# Altium PCB PCB1.PcbDoc
Units mm, origin at the board's own origin, x right, y up, seen from the top; angles counter-clockwise.
Board outline 99.06 x 101.35 mm, 2 copper layers (Top Layer, Bottom Layer); 129 components, 14 nets, 392 pads, 0 vias.
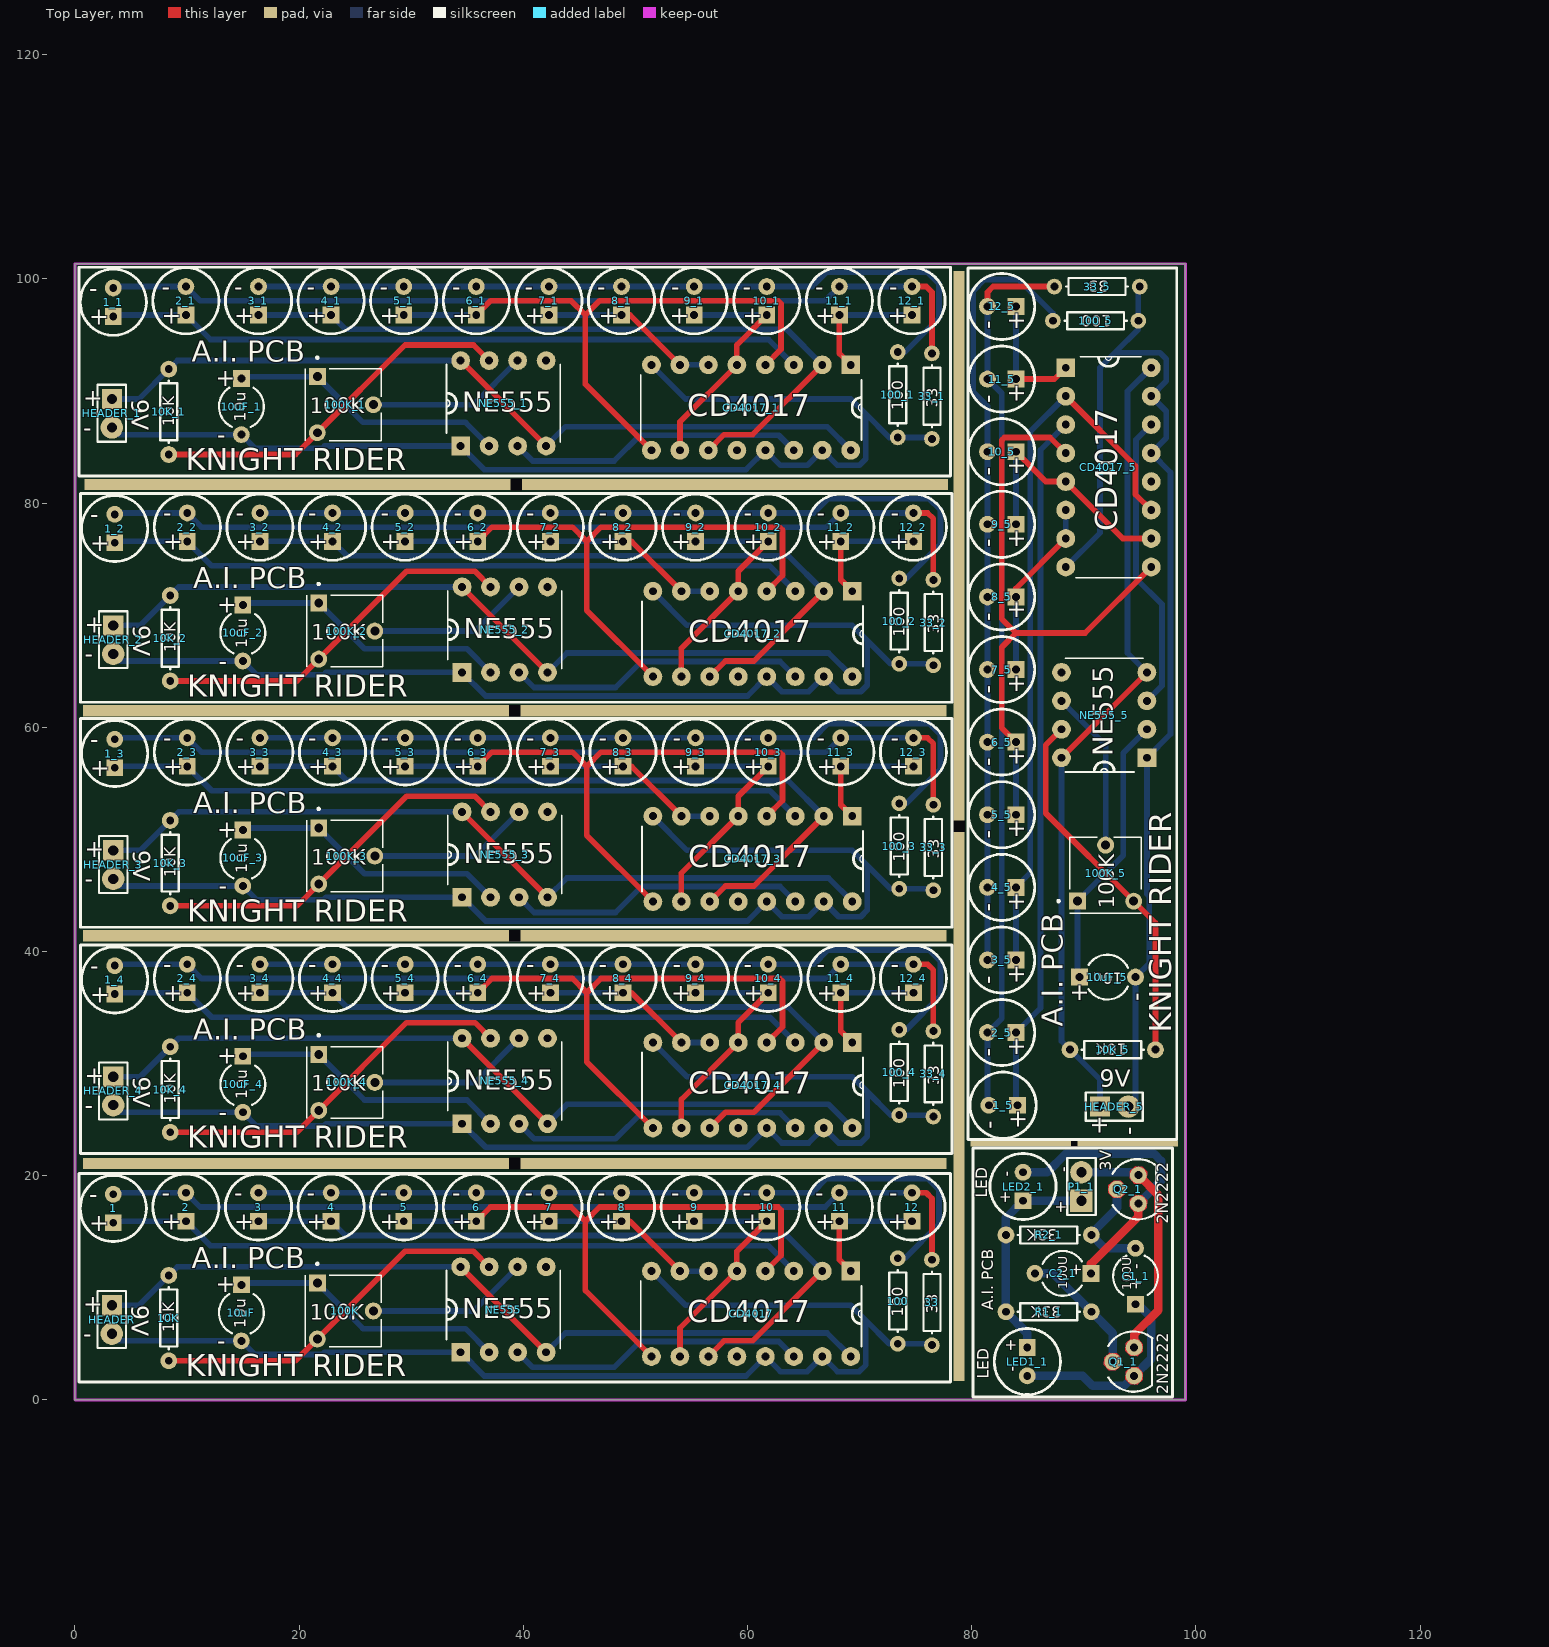
[diagram p0: Top Layer view]
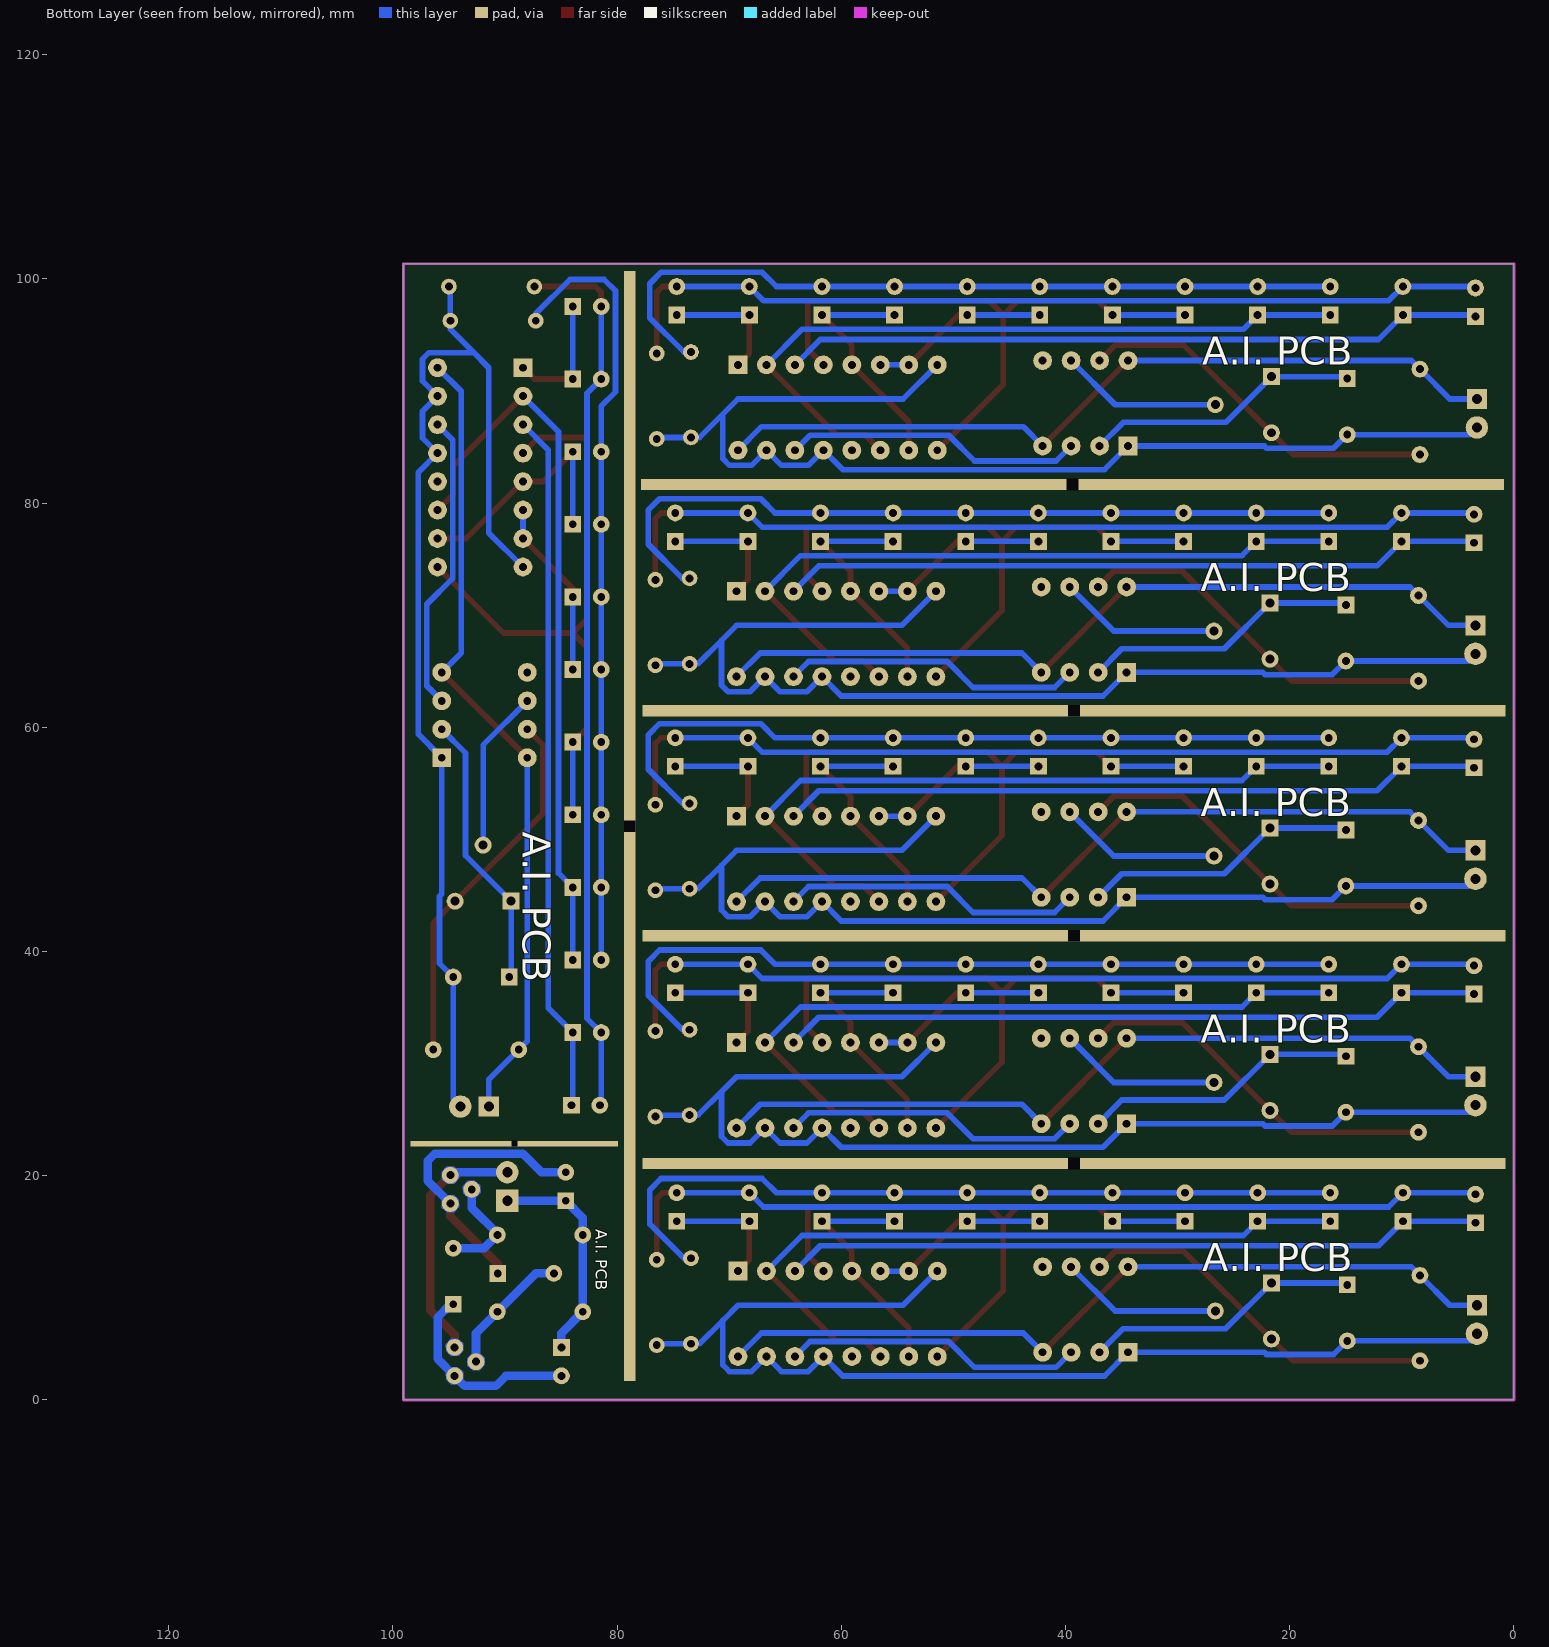
[diagram p1: Bottom Layer view, seen from below]

## Layer stack, top to bottom
Top Solder: solder mask 0.0102, Solder Resist, Dk 3.5
Top Layer: signal copper 0.0356
Dielectric 1: dielectric 0.32, FR-4, Dk 4.8
Bottom Layer: signal copper 0.0356
Bottom Solder: solder mask 0.0102, Solder Resist, Dk 3.5

## Board outline
0,0 0,101.346 99.06,101.346 99.06,0

## Design rules (kind name [scope] priority, off if disabled: settings)
Clearance [All] p1: gap=0.254 ignorepadtopadclearanceinfootprint=FALSE except(0: Arc-Hole Track-Hole SMDPad-Hole THPad-Hole Via-Hole Fill-Hole Poly-Hole Region-Hole Text-Hole)
PolygonConnect [All] p1: connectstyle=Relief reliefconductorwidth=0.254 reliefentries=4 polygonreliefangle="90 Angle" airgapwidth=0.254
RoutingVias [All] p1: holewidth=0.711 width=1.27 viastyle="Through Hole" minholewidth=0.711 minwidth=1.27 maxholewidth=0.711 maxwidth=1.27
SolderMaskExpansion [All] p1: expansion=0.102
Width [All] p1: maxlimit=0.762 minlimit=0.254 preferedwidth=0.508
30 further rules are at their usual default settings.

## Classes and differential pairs
component class Sheet1: 1 2 3 4 5 6 7 8 9 10 10K 10uF 11 12 33 100 100K CD4017 HEADER NE555

## Components (designator, comment, footprint, x,y, rotation, side; value= is the part's Value field where it differs from the comment)
1 "L-53GD" L-53GD 3.429,17.076 r90 top
1_1 "L-53GD" L-53GD 3.429,97.917 r90 top (schematic designator 1)
1_2 "L-53GD" L-53GD 3.556,77.724 r90 top (schematic designator 1)
1_3 "L-53GD" L-53GD 3.556,57.658 r90 top (schematic designator 1)
1_4 "L-53GD" L-53GD 3.556,37.465 r90 top (schematic designator 1)
1_5 "L-53GD" L-53GD 82.804,26.289 r180 top (schematic designator 1)
2 "L-53GD" L-53GD 9.906,17.203 r90 top
2_1 "L-53GD" L-53GD 9.906,98.044 r90 top (schematic designator 2)
2_2 "L-53GD" L-53GD 10.033,77.851 r90 top (schematic designator 2)
2_3 "L-53GD" L-53GD 10.033,57.785 r90 top (schematic designator 2)
2_4 "L-53GD" L-53GD 10.033,37.592 r90 top (schematic designator 2)
2_5 "L-53GD" L-53GD 82.677,32.766 r180 top (schematic designator 2)
3 "L-53GD" L-53GD 16.383,17.203 r90 top
3_1 "L-53GD" L-53GD 16.383,98.044 r90 top (schematic designator 3)
3_2 "L-53GD" L-53GD 16.51,77.851 r90 top (schematic designator 3)
3_3 "L-53GD" L-53GD 16.51,57.785 r90 top (schematic designator 3)
3_4 "L-53GD" L-53GD 16.51,37.592 r90 top (schematic designator 3)
3_5 "L-53GD" L-53GD 82.677,39.243 r180 top (schematic designator 3)
4 "L-53GD" L-53GD 22.86,17.203 r90 top
4_1 "L-53GD" L-53GD 22.86,98.044 r90 top (schematic designator 4)
4_2 "L-53GD" L-53GD 22.987,77.851 r90 top (schematic designator 4)
4_3 "L-53GD" L-53GD 22.987,57.785 r90 top (schematic designator 4)
4_4 "L-53GD" L-53GD 22.987,37.592 r90 top (schematic designator 4)
4_5 "L-53GD" L-53GD 82.677,45.72 r180 top (schematic designator 4)
5 "L-53GD" L-53GD 29.337,17.203 r90 top
5_1 "L-53GD" L-53GD 29.337,98.044 r90 top (schematic designator 5)
5_2 "L-53GD" L-53GD 29.464,77.851 r90 top (schematic designator 5)
5_3 "L-53GD" L-53GD 29.464,57.785 r90 top (schematic designator 5)
5_4 "L-53GD" L-53GD 29.464,37.592 r90 top (schematic designator 5)
5_5 "L-53GD" L-53GD 82.677,52.197 r180 top (schematic designator 5)
6 "L-53GD" L-53GD 35.814,17.203 r90 top
6_1 "L-53GD" L-53GD 35.814,98.044 r90 top (schematic designator 6)
6_2 "L-53GD" L-53GD 35.941,77.851 r90 top (schematic designator 6)
6_3 "L-53GD" L-53GD 35.941,57.785 r90 top (schematic designator 6)
6_4 "L-53GD" L-53GD 35.941,37.592 r90 top (schematic designator 6)
6_5 "L-53GD" L-53GD 82.677,58.674 r180 top (schematic designator 6)
7 "L-53GD" L-53GD 42.291,17.203 r90 top
7_1 "L-53GD" L-53GD 42.291,98.044 r90 top (schematic designator 7)
7_2 "L-53GD" L-53GD 42.418,77.851 r90 top (schematic designator 7)
7_3 "L-53GD" L-53GD 42.418,57.785 r90 top (schematic designator 7)
7_4 "L-53GD" L-53GD 42.418,37.592 r90 top (schematic designator 7)
7_5 "L-53GD" L-53GD 82.677,65.151 r180 top (schematic designator 7)
8 "L-53GD" L-53GD 48.768,17.203 r90 top
8_1 "L-53GD" L-53GD 48.768,98.044 r90 top (schematic designator 8)
8_2 "L-53GD" L-53GD 48.895,77.851 r90 top (schematic designator 8)
8_3 "L-53GD" L-53GD 48.895,57.785 r90 top (schematic designator 8)
8_4 "L-53GD" L-53GD 48.895,37.592 r90 top (schematic designator 8)
8_5 "L-53GD" L-53GD 82.677,71.628 r180 top (schematic designator 8)
9 "L-53GD" L-53GD 55.245,17.203 r90 top
9_1 "L-53GD" L-53GD 55.245,98.044 r90 top (schematic designator 9)
9_2 "L-53GD" L-53GD 55.372,77.851 r90 top (schematic designator 9)
9_3 "L-53GD" L-53GD 55.372,57.785 r90 top (schematic designator 9)
9_4 "L-53GD" L-53GD 55.372,37.592 r90 top (schematic designator 9)
9_5 "L-53GD" L-53GD 82.677,78.105 r180 top (schematic designator 9)
10 "L-53GD" L-53GD 61.722,17.203 r90 top
10_1 "L-53GD" L-53GD 61.722,98.044 r90 top (schematic designator 10)
10_2 "L-53GD" L-53GD 61.849,77.851 r90 top (schematic designator 10)
10_3 "L-53GD" L-53GD 61.849,57.785 r90 top (schematic designator 10)
10_4 "L-53GD" L-53GD 61.849,37.592 r90 top (schematic designator 10)
10_5 "L-53GD" L-53GD 82.677,84.582 r180 top (schematic designator 10)
10K "Res1" AXIAL-0.3#1 8.382,7.297 r90 top value=1K
10K_1 "Res1" AXIAL-0.3#1 8.382,88.138 r90 top value=1K (schematic designator 10K)
10K_2 "Res1" AXIAL-0.3#1 8.509,67.945 r90 top value=1K (schematic designator 10K)
10K_3 "Res1" AXIAL-0.3#1 8.509,47.879 r90 top value=1K (schematic designator 10K)
10K_4 "Res1" AXIAL-0.3#1 8.509,27.686 r90 top value=1K (schematic designator 10K)
10K_5 "Res1" AXIAL-0.3#1 92.583,31.242 r180 top value=1K (schematic designator 10K)
10uF "Cap2" CAPR5-4X5 14.859,7.765 r270 top value=10uF
10uF_1 "Cap2" CAPR5-4X5 14.859,88.606 r270 top value=10uF (schematic designator 10uF)
10uF_2 "Cap2" CAPR5-4X5 14.986,68.413 r270 top value=10uF (schematic designator 10uF)
10uF_3 "Cap2" CAPR5-4X5 14.986,48.347 r270 top value=10uF (schematic designator 10uF)
10uF_4 "Cap2" CAPR5-4X5 14.986,28.154 r270 top value=10uF (schematic designator 10uF)
10uF_5 "Cap2" CAPR5-4X5 92.115,37.719 r0 top value=10uF (schematic designator 10uF)
11 "L-53GD" L-53GD 68.199,17.203 r90 top
11_1 "L-53GD" L-53GD 68.199,98.044 r90 top (schematic designator 11)
11_2 "L-53GD" L-53GD 68.326,77.851 r90 top (schematic designator 11)
11_3 "L-53GD" L-53GD 68.326,57.785 r90 top (schematic designator 11)
11_4 "L-53GD" L-53GD 68.326,37.592 r90 top (schematic designator 11)
11_5 "L-53GD" L-53GD 82.677,91.059 r180 top (schematic designator 11)
12 "L-53GD" L-53GD 74.676,17.203 r90 top
12_1 "L-53GD" L-53GD 74.676,98.044 r90 top (schematic designator 12)
12_2 "L-53GD" L-53GD 74.803,77.851 r90 top (schematic designator 12)
12_3 "L-53GD" L-53GD 74.803,57.785 r90 top (schematic designator 12)
12_4 "L-53GD" L-53GD 74.803,37.592 r90 top (schematic designator 12)
12_5 "L-53GD" L-53GD 82.677,97.536 r180 top (schematic designator 12)
33 "Res1" AXIAL-0.3#2 76.454,8.694 r90 top value=1K
33_1 "Res1" AXIAL-0.3#2 76.454,89.535 r90 top value=1K (schematic designator 33)
33_2 "Res1" AXIAL-0.3#2 76.581,69.342 r90 top value=1K (schematic designator 33)
33_3 "Res1" AXIAL-0.3#2 76.581,49.276 r90 top value=1K (schematic designator 33)
33_4 "Res1" AXIAL-0.3#2 76.581,29.083 r90 top value=1K (schematic designator 33)
33_5 "Res1" AXIAL-0.3#2 91.186,99.314 r180 top value=1K (schematic designator 33)
100 "Res1" AXIAL-0.3#2 73.406,8.821 r90 top value=1K
100_1 "Res1" AXIAL-0.3#2 73.406,89.662 r90 top value=1K (schematic designator 100)
100_2 "Res1" AXIAL-0.3#2 73.533,69.469 r90 top value=1K (schematic designator 100)
100_3 "Res1" AXIAL-0.3#2 73.533,49.403 r90 top value=1K (schematic designator 100)
100_4 "Res1" AXIAL-0.3#2 73.533,29.21 r90 top value=1K (schematic designator 100)
100_5 "Res1" AXIAL-0.3#2 91.059,96.266 r180 top value=1K (schematic designator 100)
100K "EVN-D8AA03B14" *TRIM_EVN-D8AA03B14 24.13,7.932 r270 top
100K_1 "EVN-D8AA03B14" *TRIM_EVN-D8AA03B14 24.13,88.773 r270 top (schematic designator 100K)
100K_2 "EVN-D8AA03B14" *TRIM_EVN-D8AA03B14 24.257,68.58 r270 top (schematic designator 100K)
100K_3 "EVN-D8AA03B14" *TRIM_EVN-D8AA03B14 24.257,48.514 r270 top (schematic designator 100K)
100K_4 "EVN-D8AA03B14" *TRIM_EVN-D8AA03B14 24.257,28.321 r270 top (schematic designator 100K)
100K_5 "EVN-D8AA03B14" *TRIM_EVN-D8AA03B14 91.948,46.99 r0 top (schematic designator 100K)
C1_1 "Cap1" CAPR5-4X5 94.615,11.033 r90 top value=100uF (schematic designator C1)
C2_1 "Cap2" CAPR5-4X5 88.138,11.287 r180 top value=100uF (schematic designator C2)
CD4017 "CD4017BE" *DIP254P762X508-16 51.435,3.868 r270 top
CD4017_1 "CD4017BE" *DIP254P762X508-16 51.435,84.709 r270 top (schematic designator CD4017)
CD4017_2 "CD4017BE" *DIP254P762X508-16 51.562,64.516 r270 top (schematic designator CD4017)
CD4017_3 "CD4017BE" *DIP254P762X508-16 51.562,44.45 r270 top (schematic designator CD4017)
CD4017_4 "CD4017BE" *DIP254P762X508-16 51.562,24.257 r270 top (schematic designator CD4017)
CD4017_5 "CD4017BE" *DIP254P762X508-16 96.012,74.295 r0 top (schematic designator CD4017)
HEADER "Header 2" HDR1X2#1 3.302,8.44 r270 top
HEADER_1 "Header 2" HDR1X2#1 3.302,89.281 r270 top (schematic designator HEADER)
HEADER_2 "Header 2" HDR1X2#1 3.429,69.088 r270 top (schematic designator HEADER)
HEADER_3 "Header 2" HDR1X2#1 3.429,49.022 r270 top (schematic designator HEADER)
HEADER_4 "Header 2" HDR1X2#1 3.429,28.829 r270 top (schematic designator HEADER)
HEADER_5 "Header 2" HDR1X2#1 91.44,26.162 r0 top (schematic designator HEADER)
LED1_1 "L-53GD" L-53GD 84.963,3.413 r270 top (schematic designator LED1)
LED2_1 "L-53GD" L-53GD 84.582,19.034 r90 top (schematic designator LED2)
NE555 "NE555N" *DIP254P762X533-8 42.037,11.869 r90 top
NE555_1 "NE555N" *DIP254P762X533-8 42.037,92.71 r90 top (schematic designator NE555)
NE555_2 "NE555N" *DIP254P762X533-8 42.164,72.517 r90 top (schematic designator NE555)
NE555_3 "NE555N" *DIP254P762X533-8 42.164,52.451 r90 top (schematic designator NE555)
NE555_4 "NE555N" *DIP254P762X533-8 42.164,32.258 r90 top (schematic designator NE555)
NE555_5 "NE555N" *DIP254P762X533-8 88.011,64.897 r180 top (schematic designator NE555)
P1_1 "Header 2" HDR1X2#2 89.789,17.764 r90 top (schematic designator P1)
Q1_1 "P2N2222A" *TO92 94.488,3.413 r90 top (schematic designator Q1)
Q2_1 "P2N2222A" *TO92 94.869,18.78 r90 top (schematic designator Q2)
R1_1 "Res1" AXIAL-0.3#1 86.868,7.858 r180 top value=33K (schematic designator R1)
R2_1 "Res1" AXIAL-0.3#1 86.868,14.716 r180 top value=33K (schematic designator R2)

## Footprints (in the part's own frame and the unit in brackets; to place one, negate y for a bottom-side part, rotate by r counter-clockwise, add the part's x,y. Pads: shape width x height; smd on the part's side, far side on the other; paste and mask are expansions set on the pad)
*DIP254P762X508-16 [mil]
  rect 66x66 hole 27.56: 1(-300,700)
  round 66 hole 27.56: 2(-300,600) 3(-300,500) 4(-300,400) 5(-300,300) 6(-300,200) 7(-300,100) 8(-300,0) 9(0,0) 10(0,100) 11(0,200) 12(0,300) 13(0,400) 14(0,500) 15(0,600) 16(0,700)
  silkscreen extent -265,-38 -35,738
*DIP254P762X533-8 [mil]
  rect 66x66 hole 27.56: 1(-300,300)
  round 66 hole 27.56: 2(-300,200) 3(-300,100) 4(-300,0) 5(0,0) 6(0,100) 7(0,200) 8(0,300)
  silkscreen extent -287,-50 -13,350
*TO92 [mm]
  round 1.5 hole 0.7: 1(1.27,0) 2(0,1.905) 3(-1.27,0)
  Top Layer region: -0.482,0.287 -0.916,0.76 -1.557,0.788 -2.03,0.354 -2.058,-0.287 -1.624,-0.76 -0.983,-0.788 -0.51,-0.354
  Top Layer region: 0.788,2.192 0.354,2.665 -0.287,2.693 -0.76,2.259 -0.788,1.618 -0.354,1.145 0.287,1.117 0.76,1.551
  Top Layer region: 2.058,0.287 1.624,0.76 0.983,0.788 0.51,0.354 0.482,-0.287 0.916,-0.76 1.557,-0.788 2.03,-0.354
  Bottom Layer region: -0.482,0.287 -0.916,0.76 -1.557,0.788 -2.03,0.354 -2.058,-0.287 -1.624,-0.76 -0.983,-0.788 -0.51,-0.354
  Bottom Layer region: 0.788,2.192 0.354,2.665 -0.287,2.693 -0.76,2.259 -0.788,1.618 -0.354,1.145 0.287,1.117 0.76,1.551
  Bottom Layer region: 2.058,0.287 1.624,0.76 0.983,0.788 0.51,0.354 0.482,-0.287 0.916,-0.76 1.557,-0.788 2.03,-0.354
  Multi-Layer region: -0.482,0.287 -0.916,0.76 -1.557,0.788 -2.03,0.354 -2.058,-0.287 -1.624,-0.76 -0.983,-0.788 -0.51,-0.354
  Multi-Layer region: 0.788,2.192 0.354,2.665 -0.287,2.693 -0.76,2.259 -0.788,1.618 -0.354,1.145 0.287,1.117 0.76,1.551
  Multi-Layer region: 2.058,0.287 1.624,0.76 0.983,0.788 0.51,0.354 0.482,-0.287 0.916,-0.76 1.557,-0.788 2.03,-0.354
  silkscreen extent -2.68,-1.61 2.7,2.3
*TRIM_EVN-D8AA03B14 [mm]
  rect 1.508x1.508 hole 0.8: 1(-2.5,-2.5)
  round 1.508 hole 0.8: 2(0,2.5) 3(2.5,-2.5)
  silkscreen extent -4.3,-3.57 3.2,3.2
AXIAL-0.3#1 [mm] "Axial Device, Thru-Hole; 2 Leads; 0.3 in Pin Spacing"
  round 1.5 hole 0.7: 1(-3.81,0) 2(3.81,0)
  silkscreen extent -2.77,-0.76 2.77,0.76
AXIAL-0.3#2 [mm] "Axial Device, Thru-Hole; 2 Leads; 0.3 in Pin Spacing"
  round 1.4 hole 0.7: 1(-3.81,0) 2(3.81,0)
  silkscreen extent -2.77,-0.76 2.77,0.76
CAPR5-4X5 [mm] "Capacitor; 2 Leads"
  rect 1.5x1.5 hole 0.7: 1(-2.5,0)
  round 1.5 hole 0.7: 2(2.5,0)
  silkscreen extent -1.69,-2 1.82,2
HDR1X2#1 [mm] "Connector; Header; 2 Position"
  rect 1.8x1.8 hole 0.9: 1(0,0)
  round 2 hole 0.9: 2(2.54,0)
  silkscreen extent -1.27,-1.27 3.81,1.27
HDR1X2#2 [mm] "Connector; Header; 2 Position"
  rect 2x2 hole 0.9: 1(0,0)
  round 2 hole 0.9: 2(2.54,0)
  silkscreen extent -1.27,-1.27 3.81,1.27
L-53GD [mm]
  rect 1.5x1.5 hole 0.7: 1(-1.27,0)
  round 1.5 hole 0.7: 2(1.27,0)
  silkscreen extent -2.95,-2.95 2.95,2.95

## Part data
1 1_1 1_2 1_3 1_4 1_5 2 2_1 2_2 2_3 2_4 2_5 3 3_1 3_2 3_3 3_4 3_5 4 4_1 4_2 4_3 4_4 4_5 5 5_1 5_2 5_3 5_4 5_5 6 6_1 6_2 6_3 6_4 6_5 7 7_1 7_2 7_3 7_4 7_5 8 8_1 8_2 8_3 8_4 8_5 9 9_1 9_2 9_3 9_4 9_5 10 10_1 10_2 10_3 10_4 10_5 11 11_1 11_2 11_3 11_4 11_5 12 12_1 12_2 12_3 12_4 12_5 LED1_1 LED2_1: "LED", Manufacturer_Name=Kingbright, Mouser Part Number=N/A, RS Part Number=2286004A, Allied_Number=70424261, Allied Price/Stock=http://www.alliedelec.com/kingbright-l-53gd/70424261/, Datasheet Link=http://docs-emea.rs-online.com/webdocs/151e/0900766b8151e408.pdf, Manufacturer_Part_Number=L-53GD, Mouser Price/Stock=https://www.mouser.com/Search/Refine.aspx?Keyword=N%2FA, RS Price/Stock=http://uk.rs-online.com/web/p/products/2286004A
10K 10K_1 10K_2 10K_3 10K_4 10K_5 33 33_1 33_2 33_3 33_4 33_5 100 100_1 100_2 100_3 100_4 100_5 R1_1 R2_1: "Resistor", LatestRevisionDate=17-Jul-2002, LatestRevisionNote="Re-released for DXP Platform.", PackageDescription="Axial Device, Thru-Hole; 2 Leads; 0.3 in Pin Spacing", PackageReference=AXIAL-0.3, Published=8-Jun-2000, Publisher="Altium Limited"
10uF 10uF_1 10uF_2 10uF_3 10uF_4 10uF_5 C2_1: "Capacitor", PackageDescription="Capacitor; 2 Leads", PackageReference=CAPR5-4X5, Published=23-Sep-2002, Publisher="Altium Limited"
100K 100K_1 100K_2 100K_3 100K_4 100K_5: "Trimmer; Carbon; Rest 10 Kilohms; PCB; 1 Turn; Pwr-Rtg 0.1 W; Linear; Top Adj; 6 mm SQ", Package="PQFP-44 Panasonic", Availability=Unavailable, MF="Panasonic Electronic", MP=EVN-D8AA03B14, Price=None, SnapEDA_Link=https://www.snapeda.com/parts/EVN-D8AA03B14/Panasonic%20Electronic%20Components/view-part/?ref=snap
C1_1: library part Cap2, "Capacitor", PackageDescription="Capacitor; 2 Leads", PackageReference=CAPR5-4X5, Published=23-Sep-2002, Publisher="Altium Limited"
CD4017 CD4017_1 CD4017_2 CD4017_3 CD4017_4 CD4017_5: "IC Mos 4017/CD4017BE HARRIS", Package="DIP-16 Intersil", Availability=Unavailable, MF=Texas, MP=CD4017BE, Price=None, SnapEDA_Link=https://www.snapeda.com/parts/CD4017BE/Texas%20Instruments/view-part/?ref=snap
HEADER HEADER_1 HEADER_2 HEADER_3 HEADER_4 HEADER_5 P1_1: "Header, 2-Pin", LatestRevisionDate=17-Jul-2002, LatestRevisionNote="Re-released for DXP Platform.", Publisher="Altium Limited"
NE555 NE555_1 NE555_2 NE555_3 NE555_4 NE555_5: Package="DIP-8 Texas Instruments", Availability=Unavailable, MF="ON Semiconductor", MP=NE555N, Price=None, SnapEDA_Link=https://www.snapeda.com/parts/NE555N/ON%20Semiconductor/view-part/?ref=snap
Q1_1 Q2_1: Package="TO-92 NXP Semiconductors", Availability=Unavailable, MF="ON Semiconductor", MP=P2N2222A, Price=None, SnapEDA_Link=https://www.snapeda.com/parts/P2N2222A/ON%20Semiconductor/view-part/?ref=snap

## Free pads (board coordinates)
  rect 77x1 hole 1 square: 4(39.243,21.082) 4(39.243,41.402) 4(39.243,61.468) 4(39.37,81.661)
  rect 1x99 hole 1 square: 8(78.867,51.181)
  rect 18.5x0.5 hole 0.5 square: 9(89.154,22.86)

## Nets (pads, with @x,y where several pads share a name; then routed paths per layer and width w, separated by ;. In a path a pad name is that pad's centre, name@x,y a point inside that pad or via, vN(x,y) a via of type N, cw(c..) or ccw(c..) an arc to the next point about the centre after c; other vN are vias at no path point)
Net1_1: 1.1 2.1 CD4017.3 | length 62.6
  Bottom Layer w0.508: 1.1 3.556,15.933 2.1 12.09,13.749 61.874,13.749 CD4017.3
Net1_2: 1.2 2.2 11.2 12.2 33.2 | length 79.8
  Top Layer w0.508: 12.2 75.946,18.473 76.454,17.965 33.2
  Bottom Layer w0.508: 1.2 3.556,18.473 2.2 11.176,17.203 66.929,17.203 11.2 12.2
Net3_1: 3.1 4.1 CD4017.2 CD4017.11 | length 65.4
  Top Layer w0.508: CD4017.11 57.912,5.265 60.452,5.265 CD4017.2
  Bottom Layer w0.508: 3.1 4.1 24.13,14.663 63.5,14.663 CD4017.2
Net3_2: 3.2 4.2 5.2 6.2 7.2 8.2 9.2 10.2 100.2 | length 69.6
  Bottom Layer w0.508: 3.2 4.2 5.2 6.2 7.2 8.2 9.2 10.2 65.786,18.473 67.056,19.743 76.073,19.743 77.089,18.727 77.089,15.679 74.041,12.631 100.2
Net5_1: 5.1 6.1 CD4017.4 CD4017.9 | length 55.9
  Top Layer w0.508: 6.1 37.084,17.203 44.272,17.203 45.542,15.933 ; CD4017.9 45.542,9.761 45.542,15.933 ; CD4017.4 62.992,12.885 62.992,16.949 62.738,17.203 46.812,17.203 45.542,15.933
  Bottom Layer w0.508: 5.1 6.1
Net7_1: 7.1 8.1 CD4017.6 CD4017.7 | length 16.1
  Top Layer w0.508: 8.1 49.53,15.933 CD4017.7
  Bottom Layer w0.508: 7.1 8.1 ; CD4017.7 CD4017.6
Net9_1: 9.1 10.1 CD4017.5 CD4017.10 | length 21.8
  Top Layer w0.508: CD4017.10 53.975,6.408 CD4017.5 59.055,13.266 10.1
  Bottom Layer w0.508: 9.1 10.1
Net10K_1: 10K.1 100K.3 NE555.7 | length 33.2
  Top Layer w0.508: 10K.1 19.685,3.487 100K.3 29.464,13.266 35.56,13.266 NE555.7
Net10K_2: 10K.2 CD4017.16 HEADER.1 NE555.4 NE555.8 | length 72.1
  Top Layer w0.508: NE555.8 NE555.4
  Bottom Layer w0.508: HEADER.1 5.715,8.44 10K.2 9.144,11.869 NE555.8 ; NE555.4 43.764,5.976 67.107,5.976 CD4017.16
Net10uF_1: 10uF.1 100K.1 NE555.2 | length 24.7
  Bottom Layer w0.508: 10uF.1 15.026,10.432 100K.1 25.705,6.357 34.849,6.357 NE555.2
Net10uF_2: 10uF.2 33.1 100.1 CD4017.8 CD4017.13 CD4017.15 HEADER.2 NE555.1 | length 103.4
  Bottom Layer w0.508: HEADER.2 3.937,5.265 10uF.2 16.078,4.046 22.073,4.046 22.276,4.249 NE555.1 36.525,2.141 59.868,2.141 CD4017.13 62.941,2.522 65.329,2.522 CD4017.15 68.021,2.522 69.977,2.522 70.561,3.106 70.561,7.094 ; CD4017.8 54.483,8.44 69.215,8.44 70.561,7.094 ; 33.1 76.327,5.011 100.1 72.644,5.011 70.561,7.094
Net11_1: 11.1 12.1 CD4017.1 | length 11.3
  Top Layer w0.508: 11.1 68.199,12.504 CD4017.1
  Bottom Layer w0.508: 11.1 12.1
Net100K_2: 100K.2 NE555.6 | length 14.5
  Bottom Layer w0.508: 100K.2 35.56,7.932 NE555.6
NetCD4017_14: CD4017.14 NE555.3 | length 26.7
  Bottom Layer w0.508: NE555.3 40.843,2.903 48.108,2.903 50.419,5.214 62.789,5.214 CD4017.14
pads on no net: 1_1.1 1_1.2 1_2.1 1_2.2 1_3.1 1_3.2 1_4.1 1_4.2 1_5.1 1_5.2 2_1.1 2_1.2 2_2.1 2_2.2 2_3.1 2_3.2 2_4.1 2_4.2 2_5.1 2_5.2 3_1.1 3_1.2 3_2.1 3_2.2 3_3.1 3_3.2 3_4.1 3_4.2 3_5.1 3_5.2 4_1.1 4_1.2 4_2.1 4_2.2 4_3.1 4_3.2 4_4.1 4_4.2 4_5.1 4_5.2 5_1.1 5_1.2 5_2.1 5_2.2 5_3.1 5_3.2 5_4.1 5_4.2 5_5.1 5_5.2 6_1.1 6_1.2 6_2.1 6_2.2 6_3.1 6_3.2 6_4.1 6_4.2 6_5.1 6_5.2 7_1.1 7_1.2 7_2.1 7_2.2 7_3.1 7_3.2 7_4.1 7_4.2 7_5.1 7_5.2 8_1.1 8_1.2 8_2.1 8_2.2 8_3.1 8_3.2 8_4.1 8_4.2 8_5.1 8_5.2 9_1.1 9_1.2 9_2.1 9_2.2 9_3.1 9_3.2 9_4.1 9_4.2 9_5.1 9_5.2 10_1.1 10_1.2 10_2.1 10_2.2 10_3.1 10_3.2 10_4.1 10_4.2 10_5.1 10_5.2 10K_1.1 10K_1.2 10K_2.1 10K_2.2 10K_3.1 10K_3.2 10K_4.1 10K_4.2 10K_5.1 10K_5.2 10uF_1.1 10uF_1.2 10uF_2.1 10uF_2.2 10uF_3.1 10uF_3.2 10uF_4.1 10uF_4.2 10uF_5.1 10uF_5.2 11_1.1 11_1.2 11_2.1 11_2.2 11_3.1 11_3.2 11_4.1 11_4.2 11_5.1 11_5.2 12_1.1 12_1.2 12_2.1 12_2.2 12_3.1 12_3.2 12_4.1 12_4.2 12_5.1 12_5.2 33_1.1 33_1.2 33_2.1 33_2.2 33_3.1 33_3.2 33_4.1 33_4.2 33_5.1 33_5.2 100_1.1 100_1.2 100_2.1 100_2.2 100_3.1 100_3.2 100_4.1 100_4.2 100_5.1 100_5.2 100K_1.1 100K_1.2 100K_1.3 100K_2.1 100K_2.2 100K_2.3 100K_3.1 100K_3.2 100K_3.3 100K_4.1 100K_4.2 100K_4.3 100K_5.1 100K_5.2 100K_5.3 C1_1.1 C1_1.2 C2_1.1 C2_1.2 CD4017.12 CD4017_1.1 CD4017_1.2 CD4017_1.3 CD4017_1.4 CD4017_1.5 CD4017_1.6 CD4017_1.7 CD4017_1.8 CD4017_1.9 CD4017_1.10 CD4017_1.11 CD4017_1.12 CD4017_1.13 CD4017_1.14 CD4017_1.15 CD4017_1.16 CD4017_2.1 CD4017_2.2 CD4017_2.3 CD4017_2.4 CD4017_2.5 CD4017_2.6 CD4017_2.7 CD4017_2.8 CD4017_2.9 CD4017_2.10 CD4017_2.11 CD4017_2.12 CD4017_2.13 CD4017_2.14 CD4017_2.15 CD4017_2.16 CD4017_3.1 CD4017_3.2 CD4017_3.3 CD4017_3.4 CD4017_3.5 CD4017_3.6 CD4017_3.7 CD4017_3.8 CD4017_3.9 CD4017_3.10 CD4017_3.11 CD4017_3.12 CD4017_3.13 CD4017_3.14 CD4017_3.15 CD4017_3.16 CD4017_4.1 CD4017_4.2 CD4017_4.3 CD4017_4.4 CD4017_4.5 CD4017_4.6 CD4017_4.7 CD4017_4.8 CD4017_4.9 CD4017_4.10 CD4017_4.11 CD4017_4.12 CD4017_4.13 CD4017_4.14 CD4017_4.15 CD4017_4.16 CD4017_5.1 CD4017_5.2 CD4017_5.3 CD4017_5.4 CD4017_5.5 CD4017_5.6 CD4017_5.7 CD4017_5.8 CD4017_5.9 CD4017_5.10 CD4017_5.11 CD4017_5.12 CD4017_5.13 CD4017_5.14 CD4017_5.15 CD4017_5.16 HEADER_1.1 HEADER_1.2 HEADER_2.1 HEADER_2.2 HEADER_3.1 HEADER_3.2 HEADER_4.1 HEADER_4.2 HEADER_5.1 HEADER_5.2 LED1_1.1 LED1_1.2 LED2_1.1 LED2_1.2 NE555.5 NE555_1.1 NE555_1.2 NE555_1.3 NE555_1.4 NE555_1.5 NE555_1.6 NE555_1.7 NE555_1.8 NE555_2.1 NE555_2.2 NE555_2.3 NE555_2.4 NE555_2.5 NE555_2.6 NE555_2.7 NE555_2.8 NE555_3.1 NE555_3.2 NE555_3.3 NE555_3.4 NE555_3.5 NE555_3.6 NE555_3.7 NE555_3.8 NE555_4.1 NE555_4.2 NE555_4.3 NE555_4.4 NE555_4.5 NE555_4.6 NE555_4.7 NE555_4.8 NE555_5.1 NE555_5.2 NE555_5.3 NE555_5.4 NE555_5.5 NE555_5.6 NE555_5.7 NE555_5.8 P1_1.1 P1_1.2 Q1_1.1 Q1_1.2 Q1_1.3 Q2_1.1 Q2_1.2 Q2_1.3 R1_1.1 R1_1.2 R2_1.1 R2_1.2
copper on no net: | length 3392.5
  Top Layer w0.508: 8.382,84.328 19.685,84.328 21.63,86.273 29.464,94.107 35.56,94.107 36.957,92.71 ; 8.509,23.876 19.812,23.876 21.757,25.821 29.591,33.655 35.687,33.655 37.084,32.258 ; 8.509,44.069 19.812,44.069 21.757,46.014 29.591,53.848 35.687,53.848 37.084,52.451 ; 8.509,64.135 19.812,64.135 21.757,66.08 29.591,73.914 35.687,73.914 37.084,72.517 ; 34.417,92.71 42.037,85.09 ; 34.544,32.258 42.164,24.638 ; 34.544,52.451 42.164,44.831 ; 34.544,72.517 42.164,64.897 ; 35.814,96.774 37.084,98.044 44.272,98.044 45.542,96.774 ; 35.941,36.322 37.211,37.592 44.399,37.592 45.669,36.322 ; 35.941,56.515 37.211,57.785 44.399,57.785 45.669,56.515 ; 35.941,76.581 37.211,77.851 44.399,77.851 45.669,76.581 ; 48.768,96.774 49.53,96.774 53.975,92.329 ; 48.895,36.322 49.657,36.322 54.102,31.877 ; 48.895,56.515 49.657,56.515 54.102,52.07 ; 48.895,76.581 49.657,76.581 54.102,72.136 ; 51.435,84.709 45.542,90.602 45.542,96.774 ; 51.562,24.257 45.669,30.15 45.669,36.322 ; 51.562,44.45 45.669,50.343 45.669,56.515 ; 51.562,64.516 45.669,70.409 45.669,76.581 ; 53.975,84.709 53.975,87.249 59.055,92.329 59.055,94.107 61.722,96.774 ; 54.102,24.257 54.102,26.797 59.182,31.877 59.182,33.655 61.849,36.322 ; 54.102,44.45 54.102,46.99 59.182,52.07 59.182,53.848 61.849,56.515 ; 54.102,64.516 54.102,67.056 59.182,72.136 59.182,73.914 61.849,76.581 ; 56.515,84.709 57.912,86.106 60.452,86.106 66.675,92.329 ; 56.642,24.257 58.039,25.654 60.579,25.654 66.802,31.877 ; 56.642,44.45 58.039,45.847 60.579,45.847 66.802,52.07 ; 56.642,64.516 58.039,65.913 60.579,65.913 66.802,72.136 ; 61.595,92.329 62.992,93.726 62.992,97.79 62.738,98.044 46.812,98.044 45.542,96.774 ; 61.722,31.877 63.119,33.274 63.119,37.338 62.865,37.592 46.939,37.592 45.669,36.322 ; 61.722,52.07 63.119,53.467 63.119,57.531 62.865,57.785 46.939,57.785 45.669,56.515 ; 61.722,72.136 63.119,73.533 63.119,77.597 62.865,77.851 46.939,77.851 45.669,76.581 ; 68.199,96.774 68.199,93.345 69.215,92.329 ; 68.326,36.322 68.326,32.893 69.342,31.877 ; 68.326,56.515 68.326,53.086 69.342,52.07 ; 68.326,76.581 68.326,73.152 69.342,72.136 ; 74.676,99.314 75.946,99.314 76.454,98.806 76.454,93.345 ; 74.803,38.862 76.073,38.862 76.581,38.354 76.581,32.893 ; 74.803,59.055 76.073,59.055 76.581,58.547 76.581,53.086 ; 74.803,79.121 76.073,79.121 76.581,78.613 76.581,73.152 ; 81.407,97.536 81.407,98.806 81.915,99.314 87.376,99.314 ; 83.947,58.674 82.677,59.944 82.677,67.132 83.947,68.402 ; 83.947,71.628 83.947,72.39 88.392,76.835 ; 83.947,84.582 86.614,81.915 88.392,81.915 93.472,76.835 96.012,76.835 ; 83.947,91.059 87.376,91.059 88.392,92.075 ; 88.011,57.277 95.631,64.897 ; 88.011,59.817 86.614,58.42 86.614,52.324 94.448,44.49 96.393,42.545 96.393,31.242 ; 88.392,84.455 86.995,85.852 82.931,85.852 82.677,85.598 82.677,69.672 83.947,68.402 ; 88.392,89.535 94.615,83.312 94.615,80.772 96.012,79.375 ; 96.012,74.295 90.119,68.402 83.947,68.402
  Top Layer w0.762: 90.638,11.287 90.638,12.136 94.869,16.367 94.869,17.51 ; 94.488,4.683 94.488,5.826 96.647,7.985 96.647,18.272 94.869,20.05
  Bottom Layer w0.508: 3.302,86.741 3.937,86.106 14.859,86.106 16.078,84.887 22.073,84.887 22.276,85.09 34.417,85.09 36.525,82.982 59.868,82.982 61.595,84.709 62.941,83.363 65.329,83.363 66.675,84.709 68.021,83.363 69.977,83.363 70.561,83.947 70.561,87.935 ; 3.302,89.281 5.715,89.281 8.382,91.948 9.144,92.71 34.417,92.71 ; 3.429,26.289 4.064,25.654 14.986,25.654 16.205,24.435 22.2,24.435 22.403,24.638 34.544,24.638 36.652,22.53 59.995,22.53 61.722,24.257 63.068,22.911 65.456,22.911 66.802,24.257 68.148,22.911 70.104,22.911 70.688,23.495 70.688,27.483 ; 3.429,28.829 5.842,28.829 8.509,31.496 9.271,32.258 34.544,32.258 ; 3.429,46.482 4.064,45.847 14.986,45.847 16.205,44.628 22.2,44.628 22.403,44.831 34.544,44.831 36.652,42.723 59.995,42.723 61.722,44.45 63.068,43.104 65.456,43.104 66.802,44.45 68.148,43.104 70.104,43.104 70.688,43.688 70.688,47.676 ; 3.429,49.022 5.842,49.022 8.509,51.689 9.271,52.451 34.544,52.451 ; 3.429,66.548 4.064,65.913 14.986,65.913 16.205,64.694 22.2,64.694 22.403,64.897 34.544,64.897 36.652,62.789 59.995,62.789 61.722,64.516 63.068,63.17 65.456,63.17 66.802,64.516 68.148,63.17 70.104,63.17 70.688,63.754 70.688,67.742 ; 3.429,69.088 5.842,69.088 8.509,71.755 9.271,72.517 34.544,72.517 ; 3.429,96.647 3.556,96.774 9.906,96.774 12.09,94.59 61.874,94.59 64.135,92.329 ; 3.429,99.187 3.556,99.314 9.906,99.314 11.176,98.044 66.929,98.044 68.199,99.314 74.676,99.314 ; 3.556,36.195 3.683,36.322 10.033,36.322 12.217,34.138 62.001,34.138 64.262,31.877 ; 3.556,38.735 3.683,38.862 10.033,38.862 11.303,37.592 67.056,37.592 68.326,38.862 74.803,38.862 ; 3.556,56.388 3.683,56.515 10.033,56.515 12.217,54.331 62.001,54.331 64.262,52.07 ; 3.556,58.928 3.683,59.055 10.033,59.055 11.303,57.785 67.056,57.785 68.326,59.055 74.803,59.055 ; 3.556,76.454 3.683,76.581 10.033,76.581 12.217,74.397 62.001,74.397 64.262,72.136 ; 3.556,78.994 3.683,79.121 10.033,79.121 11.303,77.851 67.056,77.851 68.326,79.121 74.803,79.121 ; 14.859,91.106 15.026,91.273 21.63,91.273 25.705,87.198 34.849,87.198 36.957,85.09 ; 14.986,30.654 15.153,30.821 21.757,30.821 25.832,26.746 34.976,26.746 37.084,24.638 ; 14.986,50.847 15.153,51.014 21.757,51.014 25.832,46.939 34.976,46.939 37.084,44.831 ; 14.986,70.913 15.153,71.08 21.757,71.08 25.832,67.005 34.976,67.005 37.084,64.897 ; 16.383,96.774 22.86,96.774 24.13,95.504 63.5,95.504 66.675,92.329 ; 16.383,99.314 22.86,99.314 29.337,99.314 35.814,99.314 42.291,99.314 48.768,99.314 55.245,99.314 61.722,99.314 65.786,99.314 67.056,100.584 76.073,100.584 77.089,99.568 77.089,96.52 74.041,93.472 73.406,93.472 ; 16.51,36.322 22.987,36.322 24.257,35.052 63.627,35.052 66.802,31.877 ; 16.51,38.862 22.987,38.862 29.464,38.862 35.941,38.862 42.418,38.862 48.895,38.862 55.372,38.862 61.849,38.862 65.913,38.862 67.183,40.132 76.2,40.132 77.216,39.116 77.216,36.068 74.168,33.02 73.533,33.02 ; 16.51,56.515 22.987,56.515 24.257,55.245 63.627,55.245 66.802,52.07 ; 16.51,59.055 22.987,59.055 29.464,59.055 35.941,59.055 42.418,59.055 48.895,59.055 55.372,59.055 61.849,59.055 65.913,59.055 67.183,60.325 76.2,60.325 77.216,59.309 77.216,56.261 74.168,53.213 73.533,53.213 ; 16.51,76.581 22.987,76.581 24.257,75.311 63.627,75.311 66.802,72.136 ; 16.51,79.121 22.987,79.121 29.464,79.121 35.941,79.121 42.418,79.121 48.895,79.121 55.372,79.121 61.849,79.121 65.913,79.121 67.183,80.391 76.2,80.391 77.216,79.375 77.216,76.327 74.168,73.279 73.533,73.279 ; 26.63,88.773 35.56,88.773 39.497,92.71 ; 26.757,28.321 35.687,28.321 39.624,32.258 ; 26.757,48.514 35.687,48.514 39.624,52.451 ; 26.757,68.58 35.687,68.58 39.624,72.517 ; 29.337,96.774 35.814,96.774 ; 29.464,36.322 35.941,36.322 ; 29.464,56.515 35.941,56.515 ; 29.464,76.581 35.941,76.581 ; 39.497,85.09 40.843,83.744 48.108,83.744 50.419,86.055 62.789,86.055 64.135,84.709 ; 39.624,24.638 40.97,23.292 48.235,23.292 50.546,25.603 62.916,25.603 64.262,24.257 ; 39.624,44.831 40.97,43.485 48.235,43.485 50.546,45.796 62.916,45.796 64.262,44.45 ; 39.624,64.897 40.97,63.551 48.235,63.551 50.546,65.862 62.916,65.862 64.262,64.516 ; 42.037,85.09 43.764,86.817 67.107,86.817 69.215,84.709 ; 42.164,24.638 43.891,26.365 67.234,26.365 69.342,24.257 ; 42.164,44.831 43.891,46.558 67.234,46.558 69.342,44.45 ; 42.164,64.897 43.891,66.624 67.234,66.624 69.342,64.516 ; 42.291,96.774 48.768,96.774 ; 42.418,36.322 48.895,36.322 ; 42.418,56.515 48.895,56.515 ; 42.418,76.581 48.895,76.581 ; 51.435,92.329 54.483,89.281 69.215,89.281 70.561,87.935 ; 51.562,31.877 54.61,28.829 69.342,28.829 70.688,27.483 ; 51.562,52.07 54.61,49.022 69.342,49.022 70.688,47.676 ; 51.562,72.136 54.61,69.088 69.342,69.088 70.688,67.742 ; 53.975,92.329 56.515,92.329 ; 54.102,31.877 56.642,31.877 ; 54.102,52.07 56.642,52.07 ; 54.102,72.136 56.642,72.136 ; 55.245,96.774 61.722,96.774 ; 55.372,36.322 61.849,36.322 ; 55.372,56.515 61.849,56.515 ; 55.372,76.581 61.849,76.581 ; 68.199,96.774 74.676,96.774 ; 68.326,36.322 74.803,36.322 ; 68.326,56.515 74.803,56.515 ; 68.326,76.581 74.803,76.581 ; 76.454,85.725 76.327,85.852 73.406,85.852 72.644,85.852 70.561,87.935 ; 76.581,25.273 76.454,25.4 73.533,25.4 72.771,25.4 70.688,27.483 ; 76.581,45.466 76.454,45.593 73.533,45.593 72.771,45.593 70.688,47.676 ; 76.581,65.532 76.454,65.659 73.533,65.659 72.771,65.659 70.688,67.742 ; 81.407,39.243 81.407,45.72 81.407,52.197 81.407,58.674 81.407,65.151 81.407,71.628 81.407,78.105 81.407,84.582 81.407,88.646 80.137,89.916 80.137,98.933 81.153,99.949 84.201,99.949 87.249,96.901 87.249,96.266 ; 81.407,97.536 81.407,91.059 82.677,89.789 82.677,34.036 81.407,32.766 81.407,26.416 81.534,26.289 ; 83.947,39.243 83.947,45.72 85.217,46.99 85.217,86.36 88.392,89.535 ; 83.947,52.197 83.947,58.674 ; 83.947,65.151 83.947,71.628 ; 83.947,78.105 83.947,84.582 ; 83.947,91.059 83.947,97.536 ; 84.074,26.289 83.947,26.416 83.947,32.766 86.131,34.95 86.131,84.734 88.392,86.995 ; 88.011,57.277 88.011,32.004 88.773,31.242 91.44,28.575 91.44,26.162 ; 88.011,62.357 91.948,58.42 91.948,49.49 ; 88.392,74.295 91.44,77.343 91.44,92.075 92.786,93.421 ; 88.392,76.835 88.392,79.375 ; 89.615,37.719 89.448,37.886 89.448,44.49 93.523,48.565 93.523,57.709 95.631,59.817 ; 93.98,26.162 94.615,26.797 94.615,37.719 95.834,38.938 95.834,44.933 95.631,45.136 95.631,57.277 97.739,59.385 97.739,82.728 96.012,84.455 97.358,85.801 97.358,88.189 96.012,89.535 97.358,90.881 97.358,92.837 96.774,93.421 92.786,93.421 ; 94.996,99.314 94.869,99.187 94.869,96.266 94.869,95.504 92.786,93.421 ; 95.631,62.357 96.977,63.703 96.977,70.968 94.666,73.279 94.666,85.649 96.012,86.995 ; 95.631,64.897 93.904,66.624 93.904,89.967 96.012,92.075
  Bottom Layer w0.762: 84.582,20.304 86.741,20.304 88.408,21.971 96.25,21.971 96.901,21.32 96.901,19.542 94.869,17.51 ; 84.963,2.143 89.916,2.143 90.805,1.254 93.599,1.254 94.488,2.143 96.012,3.667 96.012,7.35 94.829,8.533 94.615,8.533 ; 84.963,4.683 84.963,5.953 83.058,7.858 83.058,14.716 83.058,16.24 84.582,17.764 89.789,17.764 ; 85.638,11.287 87.249,11.287 90.678,7.858 92.583,5.953 92.583,3.413 ; 89.789,20.304 94.615,20.304 94.869,20.05 ; 92.964,18.78 92.964,17.129 90.678,14.843 90.678,14.716 91.861,13.533 94.615,13.533

## Keep-outs
Keep-Out Layer:
  the board outline again, w0.254

## Silkscreen, mask and mechanical layers (free items; w line width, h text height)
Top Overlay:
  lines w0.254: 33.274,7.17 ccw(c33.21,7.996) 34.036,8.059 ccw(c33.21,8.123) 33.274,8.948 ; 33.274,88.011 ccw(c33.21,88.837) 34.036,88.9 ccw(c33.21,88.963) 33.274,89.789 ; 33.401,27.559 ccw(c33.337,28.384) 34.163,28.448 ccw(c33.337,28.511) 33.401,29.337 ; 33.401,47.752 ccw(c33.337,48.578) 34.163,48.641 ccw(c33.337,48.704) 33.401,49.53 ; 33.401,67.818 ccw(c33.337,68.644) 34.163,68.707 ccw(c33.337,68.77) 33.401,69.596 ; 70.104,6.789 cw(c70.168,7.615) 69.342,7.678 cw(c70.168,7.742) 70.104,8.567 ; 70.104,87.63 cw(c70.168,88.456) 69.342,88.519 cw(c70.168,88.582) 70.104,89.408 ; 70.231,27.178 cw(c70.294,28.003) 69.469,28.067 cw(c70.294,28.13) 70.231,28.956 ; 70.231,47.371 cw(c70.294,48.197) 69.469,48.26 cw(c70.294,48.323) 70.231,49.149 ; 70.231,67.437 cw(c70.294,68.263) 69.469,68.326 cw(c70.294,68.389) 70.231,69.215 ; 90.932,56.134 cw(c91.757,56.07) 91.821,56.896 cw(c91.885,56.07) 92.71,56.134 ; 91.313,92.964 ccw(c92.138,93.027) 92.202,92.202 ccw(c92.266,93.027) 93.091,92.964 ; 0.381,1.582 0.381,20.193 78.105,20.193 78.105,1.582 0.635,1.582 0.381,1.582 ; 0.381,82.423 0.635,82.423 78.105,82.423 78.105,101.034 0.381,101.034 0.381,82.423 ; 0.508,21.971 0.762,21.971 78.232,21.971 78.232,40.582 0.508,40.582 0.508,21.971 ; 0.508,42.164 0.762,42.164 78.232,42.164 78.232,60.775 0.508,60.775 0.508,42.164 ; 0.508,62.23 0.762,62.23 78.232,62.23 78.232,80.841 0.508,80.841 0.508,62.23 ; 79.687,23.241 79.687,100.965 98.298,100.965 98.298,23.495 98.298,23.241 79.687,23.241 ; 80.121,0.254 97.917,0.254 97.917,22.479 80.121,22.479 80.121,0.254
  text "33" at 92.202,99.822 h1 r180
  text "-" at 7.747,98.552 h1.52
  text "-" at 14.224,98.552 h1.52
  text "-" at 20.701,98.552 h1.52
  text "-" at 27.178,98.552 h1.52
  text "-" at 33.655,98.552 h1.52
  text "-" at 40.132,98.552 h1.52
  text "-" at 46.609,98.552 h1.52
  text "-" at 53.213,98.552 h1.52
  text "-" at 59.563,98.552 h1.52
  text "-" at 66.04,98.552 h1.52
  text "-" at 72.644,98.552 h1.52
  text "-" at 1.27,98.425 h1.52
  text "100" at 92.456,96.774 h1 r180
  text "+" at 7.747,96.012 h1.52
  text "+" at 14.224,96.012 h1.52
  text "+" at 20.701,96.012 h1.52
  text "+" at 27.178,96.012 h1.52
  text "+" at 33.655,96.012 h1.52
  text "+" at 40.132,96.012 h1.52
  text "+" at 46.736,96.012 h1.52
  text "+" at 53.086,96.012 h1.52
  text "+" at 59.563,96.012 h1.52
  text "+" at 66.04,96.012 h1.52
  text "+" at 72.517,96.012 h1.52
  text "+" at 1.27,95.885 h1.52
  text "-" at 82.169,95.504 h1.52 r90
  text "+" at 84.709,95.377 h1.52 r90
  text "A.I. PCB" at 10.414,92.583 h1.9
  text "+" at 12.573,90.424 h1.52
  text "9V" at 5.08,89.281 h1.52 r270
  text "-" at 82.169,88.9 h1.52 r90
  text "+" at 84.709,88.9 h1.52 r90
  text "+" at 0.762,88.646 h1.52
  text "33" at 76.962,88.519 h1 r90
  text "100" at 73.914,88.265 h1 r90
  text "NE555" at 34.544,88.138 h1.8
  text "100K" at 20.955,88.011 h1.4
  text "CD4017" at 54.61,87.757 h2
  text "10u" at 15.24,87.249 h1 r90
  text "10K" at 8.89,86.868 h1 r90
  text "-" at 0.762,85.979 h1.52
  text "-" at 12.7,85.344 h1.52
  text "KNIGHT RIDER" at 9.906,82.931 h2
  text "-" at 82.169,82.423 h1.52 r90
  text "+" at 84.709,82.423 h1.52 r90
  text "-" at 7.874,78.359 h1.52
  text "-" at 14.351,78.359 h1.52
  text "-" at 20.828,78.359 h1.52
  text "-" at 27.305,78.359 h1.52
  text "-" at 33.782,78.359 h1.52
  text "-" at 40.259,78.359 h1.52
  text "-" at 46.736,78.359 h1.52
  text "-" at 53.34,78.359 h1.52
  text "-" at 59.69,78.359 h1.52
  text "-" at 66.167,78.359 h1.52
  text "-" at 72.771,78.359 h1.52
  text "-" at 1.397,78.232 h1.52
  text "CD4017" at 92.964,77.47 h2 r90
  text "-" at 82.169,76.073 h1.52 r90
  text "+" at 84.709,75.946 h1.52 r90
  text "+" at 7.874,75.819 h1.52
  text "+" at 14.351,75.819 h1.52
  text "+" at 20.828,75.819 h1.52
  text "+" at 27.305,75.819 h1.52
  text "+" at 33.782,75.819 h1.52
  text "+" at 40.259,75.819 h1.52
  text "+" at 46.863,75.819 h1.52
  text "+" at 53.213,75.819 h1.52
  text "+" at 59.69,75.819 h1.52
  text "+" at 66.167,75.819 h1.52
  text "+" at 72.644,75.819 h1.52
  text "+" at 1.397,75.692 h1.52
  text "A.I. PCB" at 10.541,72.39 h1.9
  text "+" at 12.7,70.231 h1.52
  text "+" at 84.709,69.596 h1.52 r90
  text "-" at 82.169,69.469 h1.52 r90
  text "9V" at 5.207,69.088 h1.52 r270
  text "+" at 0.889,68.453 h1.52
  text "33" at 77.089,68.326 h1 r90
  text "100" at 74.041,68.072 h1 r90
  text "NE555" at 34.671,67.945 h1.8
  text "100K" at 21.082,67.818 h1.4
  text "CD4017" at 54.737,67.564 h2
  text "10u" at 15.367,67.056 h1 r90
  text "10K" at 9.017,66.675 h1 r90
  text "-" at 0.889,65.786 h1.52
  text "-" at 12.827,65.151 h1.52
  text "-" at 82.169,62.992 h1.52 r90
  text "+" at 84.709,62.992 h1.52 r90
  text "KNIGHT RIDER" at 10.033,62.738 h2
  text "-" at 7.874,58.293 h1.52
  text "-" at 14.351,58.293 h1.52
  text "-" at 20.828,58.293 h1.52
  text "-" at 27.305,58.293 h1.52
  text "-" at 33.782,58.293 h1.52
  text "-" at 40.259,58.293 h1.52
  text "-" at 46.736,58.293 h1.52
  text "-" at 53.34,58.293 h1.52
  text "-" at 59.69,58.293 h1.52
  text "-" at 66.167,58.293 h1.52
  text "-" at 72.771,58.293 h1.52
  text "-" at 1.397,58.166 h1.52
  text "NE555" at 92.583,57.404 h1.8 r90
  text "-" at 82.169,56.515 h1.52 r90
  text "+" at 84.709,56.515 h1.52 r90
  text "+" at 7.874,55.753 h1.52
  text "+" at 14.351,55.753 h1.52
  text "+" at 20.828,55.753 h1.52
  text "+" at 27.305,55.753 h1.52
  text "+" at 33.782,55.753 h1.52
  text "+" at 40.259,55.753 h1.52
  text "+" at 46.863,55.753 h1.52
  text "+" at 53.213,55.753 h1.52
  text "+" at 59.69,55.753 h1.52
  text "+" at 66.167,55.753 h1.52
  text "+" at 72.644,55.753 h1.52
  text "+" at 1.397,55.626 h1.52
  text "A.I. PCB" at 10.541,52.324 h1.9
  text "+" at 12.7,50.165 h1.52
  text "-" at 82.169,50.038 h1.52 r90
  text "+" at 84.709,50.038 h1.52 r90
  text "9V" at 5.207,49.022 h1.52 r270
  text "+" at 0.889,48.387 h1.52
  text "33" at 77.089,48.26 h1 r90
  text "100" at 74.041,48.006 h1 r90
  text "NE555" at 34.671,47.879 h1.8
  text "100K" at 21.082,47.752 h1.4
  text "CD4017" at 54.737,47.498 h2
  text "10u" at 15.367,46.99 h1 r90
  text "10K" at 9.017,46.609 h1 r90
  text "-" at 0.889,45.72 h1.52
  text "-" at 12.827,45.085 h1.52
  text "100K" at 92.71,43.815 h1.4 r90
  text "-" at 82.169,43.561 h1.52 r90
  text "+" at 84.709,43.561 h1.52 r90
  text "KNIGHT RIDER" at 10.033,42.672 h2
  text "-" at 7.874,38.1 h1.52
  text "-" at 14.351,38.1 h1.52
  text "-" at 20.828,38.1 h1.52
  text "-" at 27.305,38.1 h1.52
  text "-" at 33.782,38.1 h1.52
  text "-" at 40.259,38.1 h1.52
  text "-" at 46.736,38.1 h1.52
  text "-" at 53.34,38.1 h1.52
  text "-" at 59.69,38.1 h1.52
  text "-" at 66.167,38.1 h1.52
  text "-" at 72.771,38.1 h1.52
  text "10u" at 93.472,38.1 h1 r180
  text "-" at 1.397,37.973 h1.52
  text "-" at 82.169,37.084 h1.52 r90
  text "+" at 84.709,37.084 h1.52 r90
  text "+" at 7.874,35.56 h1.52
  text "+" at 14.351,35.56 h1.52
  text "+" at 20.828,35.56 h1.52
  text "+" at 27.305,35.56 h1.52
  text "+" at 33.782,35.56 h1.52
  text "+" at 40.259,35.56 h1.52
  text "+" at 46.863,35.56 h1.52
  text "+" at 53.213,35.56 h1.52
  text "+" at 59.69,35.56 h1.52
  text "+" at 66.167,35.56 h1.52
  text "+" at 72.644,35.56 h1.52
  text "-" at 95.377,35.56 h1.52 r90
  text "+" at 1.397,35.433 h1.52
  text "+" at 90.297,35.433 h1.52 r90
  text "A.I. PCB" at 88.138,33.274 h1.9 r90
  text "KNIGHT RIDER" at 97.79,32.766 h2 r90
  text "A.I. PCB" at 10.541,32.131 h1.9
  text "10K" at 93.853,31.75 h1 r180
  text "-" at 82.169,30.607 h1.52 r90
  text "+" at 84.709,30.607 h1.52 r90
  text "+" at 12.7,29.972 h1.52
  text "9V" at 5.207,28.829 h1.52 r270
  text "+" at 0.889,28.194 h1.52
  text "33" at 77.089,28.067 h1 r90
  text "9V" at 91.44,27.94 h1.52
  text "100" at 74.041,27.813 h1 r90
  text "NE555" at 34.671,27.686 h1.8
  text "100K" at 21.082,27.559 h1.4
  text "CD4017" at 54.737,27.305 h2
  text "10u" at 15.367,26.797 h1 r90
  text "10K" at 9.017,26.416 h1 r90
  text "-" at 0.889,25.527 h1.52
  text "-" at 12.827,24.892 h1.52
  text "-" at 82.296,24.13 h1.52 r90
  text "+" at 84.836,24.13 h1.52 r90
  text "+" at 92.075,23.622 h1.52 r90
  text "-" at 94.742,23.622 h1.52 r90
  text "KNIGHT RIDER" at 10.033,22.479 h2
  text "3V" at 92.44,20.447 h1 r90
  text "-" at 88.646,20.304 h1 r90
  text "-" at 83.566,19.923 h1 r90
  text "LED" at 81.391,18.034 h1 r90
  text "-" at 7.747,17.711 h1.52
  text "-" at 14.224,17.711 h1.52
  text "-" at 20.701,17.711 h1.52
  text "-" at 27.178,17.711 h1.52
  text "-" at 33.655,17.711 h1.52
  text "-" at 40.132,17.711 h1.52
  text "-" at 46.609,17.711 h1.52
  text "-" at 53.213,17.711 h1.52
  text "-" at 59.563,17.711 h1.52
  text "-" at 66.04,17.711 h1.52
  text "-" at 72.644,17.711 h1.52
  text "-" at 1.27,17.584 h1.52
  text "+" at 83.439,17.51 h1 r90
  text "+" at 88.392,16.621 h1 r90
  text "2N2222" at 97.536,15.732 h1 r90
  text "33K" at 87.63,15.224 h1 r180
  text "+" at 7.747,15.171 h1.52
  text "+" at 14.224,15.171 h1.52
  text "+" at 20.701,15.171 h1.52
  text "+" at 27.178,15.171 h1.52
  text "+" at 33.655,15.171 h1.52
  text "+" at 40.132,15.171 h1.52
  text "+" at 46.736,15.171 h1.52
  text "+" at 53.086,15.171 h1.52
  text "+" at 59.563,15.171 h1.52
  text "+" at 66.04,15.171 h1.52
  text "+" at 72.517,15.171 h1.52
  text "+" at 1.27,15.044 h1.52
  text "A.I. PCB" at 10.414,11.742 h1.9
  text "-" at 95.123,11.668 h1 r90
  text "+" at 89.789,11.033 h1 r90
  text "-" at 87.122,10.779 h1 r90
  text "100U" at 88.519,9.89 h0.8 r90
  text "100U" at 94.234,9.763 h0.8 r90
  text "+" at 95.123,9.763 h1 r90
  text "+" at 12.573,9.583 h1.52
  text "9V" at 5.08,8.44 h1.52 r270
  text "33K" at 88.011,8.366 h1 r180
  text "A.I. PCB" at 81.915,7.985 h1 r90
  text "+" at 0.762,7.805 h1.52
  text "33" at 76.962,7.678 h1 r90
  text "100" at 73.914,7.424 h1 r90
  text "NE555" at 34.544,7.297 h1.8
  text "100K" at 20.955,7.17 h1.4
  text "CD4017" at 54.61,6.916 h2
  text "10u" at 15.24,6.408 h1 r90
  text "10K" at 8.89,6.027 h1 r90
  text "-" at 0.762,5.138 h1.52
  text "-" at 12.7,4.503 h1.52
  text "+" at 83.947,4.302 h1 r90
  text "-" at 84.074,2.524 h1 r90
  text "KNIGHT RIDER" at 9.906,2.09 h2
  text "LED" at 81.534,1.889 h1 r90
  text "2N2222" at 97.536,0.492 h1 r90
Bottom Overlay:
  text "A.I. PCB" at 27.813,92.329 h2.5
  text "A.I. PCB" at 27.94,72.136 h2.5
  text "A.I. PCB" at 27.94,52.07 h2.5
  text "A.I. PCB" at 88.392,50.673 h2.5 r90
  text "A.I. PCB" at 27.94,31.877 h2.5
  text "A.I. PCB" at 81.915,15.224 h1 r90
  text "A.I. PCB" at 27.813,11.488 h2.5